# EAGLE board DronePoles (EAGLE 7.0.0)
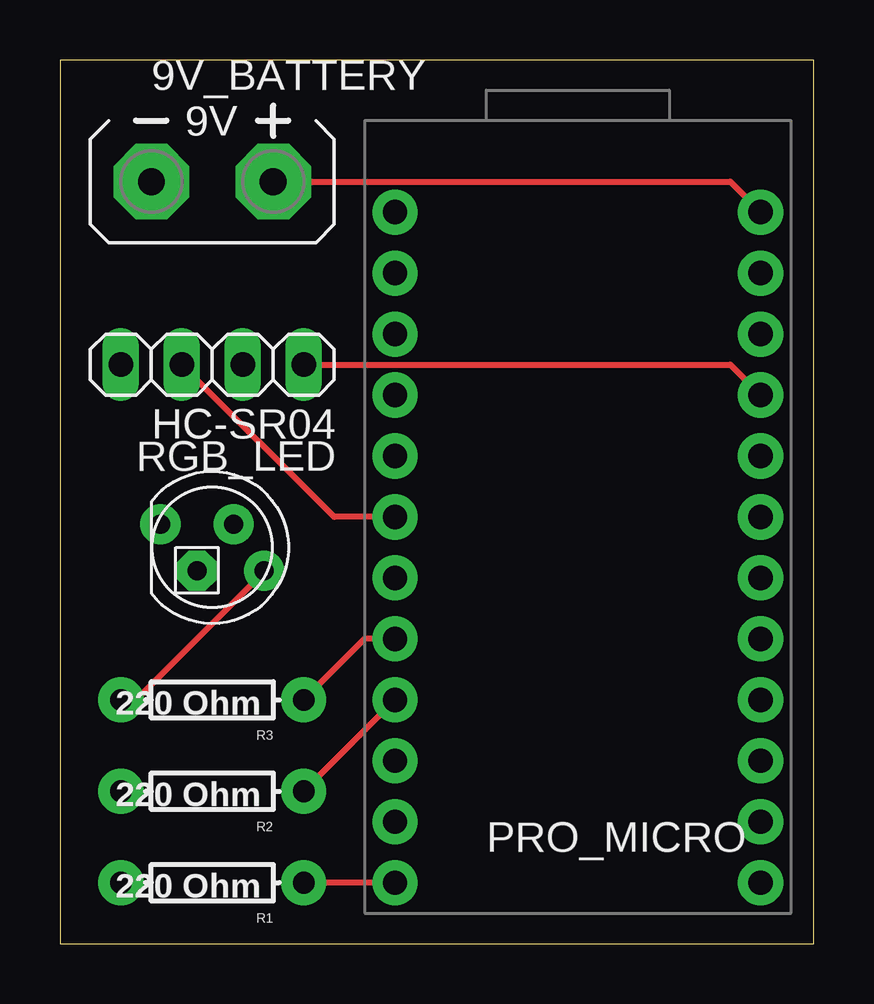
[diagram p0: board, top side]
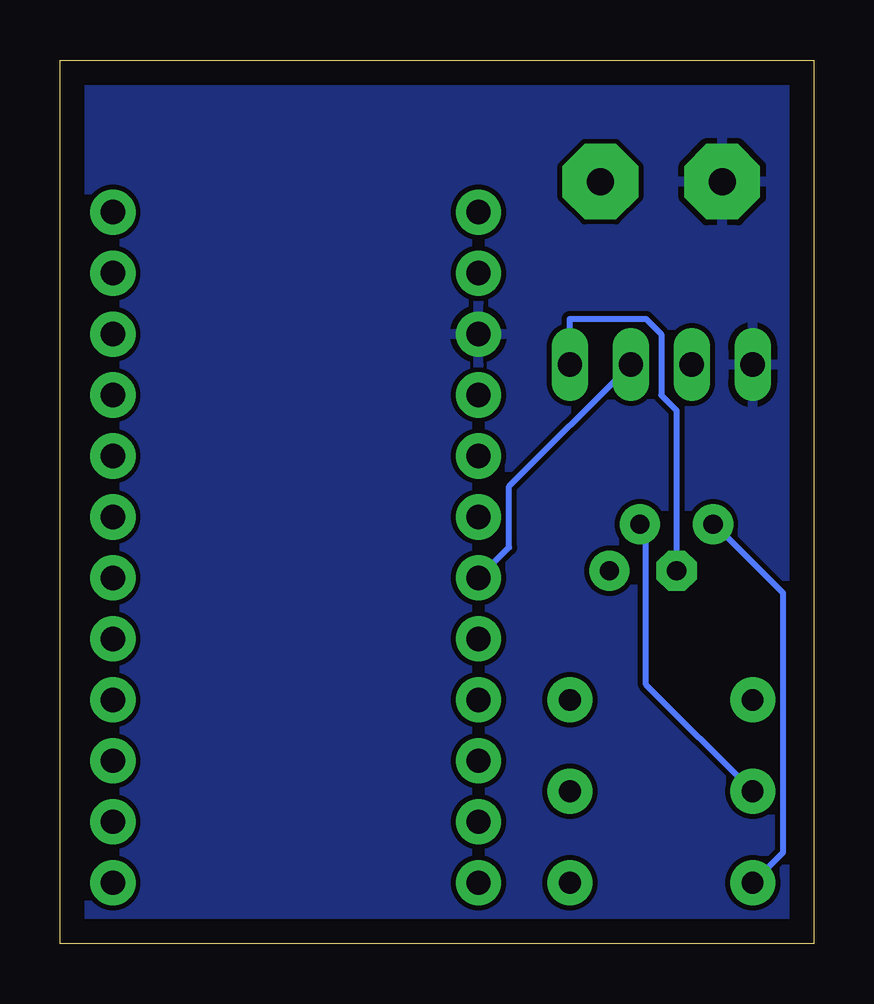
[diagram p1: board, bottom side, seen from below]

Size 31.42 x 36.82 mm. Coordinates in mm from the lower left corner, seen from the top.
Outline: 0,0 31.42,0 31.42,36.82 0,36.82 0,0
Copper layers (1*16): Top 0.035mm / dielectric 1.5mm / Bottom 0.035mm
Design rules "default": minimum track width 10mil, minimum drill 24mil, track to track 8mil, track to pad 8mil, pad to pad 8mil, via to via 8mil, smd to smd 8mil, copper to edge 40mil, drill to drill 8mil, minimum pad ring 10mil, minimum via ring 8mil, stop-mask expansion 4mil, vias tented up to drill 0mil, thermal gap 10mil

## Footprints (pad centres in the part's own frame; a part is rotated, then mirrored left to right if it is on the bottom)
AB9V = drill 1.118 pad 3.15 octagon: + 0,2.54; - 0,-2.54
1X04 = drill 1.016 long: 1 -3.81,0; 2 -1.27,0; 3 1.27,0; 4 3.81,0
ARDUINO_PRO_MICRO = drill 1.016 pad 1.88: 1 -7.62,12.7; 2 -7.62,10.16; 3 -7.62,7.62; 4 -7.62,5.08; 5 -7.62,2.54; 6 -7.62,0; 7 -7.62,-2.54; 8 -7.62,-5.08; 9 -7.62,-7.62; 10 -7.62,-10.16; 11 -7.62,-12.7; 12 -7.62,-15.24; 13 7.62,-15.24; 14 7.62,-12.7; 15 7.62,-10.16; 16 7.62,-7.62; 17 7.62,-5.08; 18 7.62,-2.54; 19 7.62,0; 20 7.62,2.54; 21 7.62,5.08; 22 7.62,7.62; 23 7.62,10.16; 24 7.62,12.7
AXIAL-0.3 = drill 0.9 pad 1.88: P$1 -3.81,0; P$2 3.81,0
LED5MMRGB = drill 0.8 pad 1.676: 1 -2.159,0.968; 3 0.889,0.968; 4 2.159,-0.968 | drill 0.8 pad 1.676 octagon: 2 -0.635,-0.968

## Placement (x,y rotation side)
9V_BATTERY  AB9V  [AB9V]  6.35,31.75 270 top
HC-SR04  Ultrasonic sensor  [1X04]  6.35,24.13 180 top
PRO_MICRO  ARDUINO_PRO_MICRO  [ARDUINO_PRO_MICRO]  21.59,17.78 0 top
R1  220 Ohm  [AXIAL-0.3]  6.35,2.54 180 top
R2  220 Ohm  [AXIAL-0.3]  6.35,6.35 180 top
R3  220 Ohm  [AXIAL-0.3]  6.35,10.16 180 top
RGB_LED  RGBLED_CA  [LED5MMRGB]  6.35,16.51 0 top

## Library data of the parts
9V_BATTERY = battery
HC-SR04 = pinhead
PRO_MICRO = SparkFun-Boards
R1-R3 = SparkFun-Passives
RGB_LED = adafruit

## Nets
9V: 9V_BATTERY.+ PRO_MICRO.24
ECHO: HC-SR04.3 PRO_MICRO.6
GND: 9V_BATTERY.- HC-SR04.4 PRO_MICRO.3
N$1: R3.P$2 RGB_LED.4
N$2: R2.P$2 RGB_LED.3
N$3: R1.P$2 RGB_LED.1
N$5: PRO_MICRO.9 R2.P$1
N$7: PRO_MICRO.12 R1.P$1
N$9: PRO_MICRO.8 R3.P$1
TRIG: HC-SR04.2 PRO_MICRO.7
VCC: HC-SR04.1 PRO_MICRO.21 RGB_LED.2

## Tracks (layer width: path | path; a pad name or v marks a point on that pad's centre or on a via)
9V
  Top 0.254: PRO_MICRO.24 27.94,31.75 9V_BATTERY.+
ECHO
  Top 0.254: HC-SR04.3 11.43,17.78 PRO_MICRO.6
GND
  pour Bottom: -5.08,39.37 36.83,39.37 36.83,-5.08 -5.08,-5.08
N$1
  Top 0.254: R3.P$2 3.18,10.16 8.25,15.24 RGB_LED.4
N$2
  Bottom 0.254: R2.P$2 6.98,10.79 6.98,17.14 RGB_LED.3
N$3
  Bottom 0.254: R1.P$2 1.27,3.81 1.27,14.6 3.81,17.14 RGB_LED.1
N$5
  Top 0.254: PRO_MICRO.9 R2.P$1
N$7
  Top 0.254: PRO_MICRO.12 R1.P$1
N$9
  Top 0.254: R3.P$1 12.7,12.7 PRO_MICRO.8
TRIG
  Bottom 0.254: HC-SR04.2 12.7,19.05 12.7,16.51 PRO_MICRO.7
VCC
  Top 0.254: PRO_MICRO.21 27.94,24.13 HC-SR04.1
  Bottom 0.254: HC-SR04.1 10.16,26.04 6.98,26.04 6.35,25.4 6.35,22.86 5.71,22.23 RGB_LED.2